# Altium PCB Mirny_AFE_Template.PcbDoc
Units mm, origin at the board's own origin, x right, y up, seen from the top; angles counter-clockwise.
Board outline 111.11 x 100 mm, 6 copper layers (L1, P2, L3, L4, P5, L6), stack 1.648 mm thick; 13 components, 19 nets, 50 pads, 20 vias.
Unrouted connection lines stored in the file: 1.
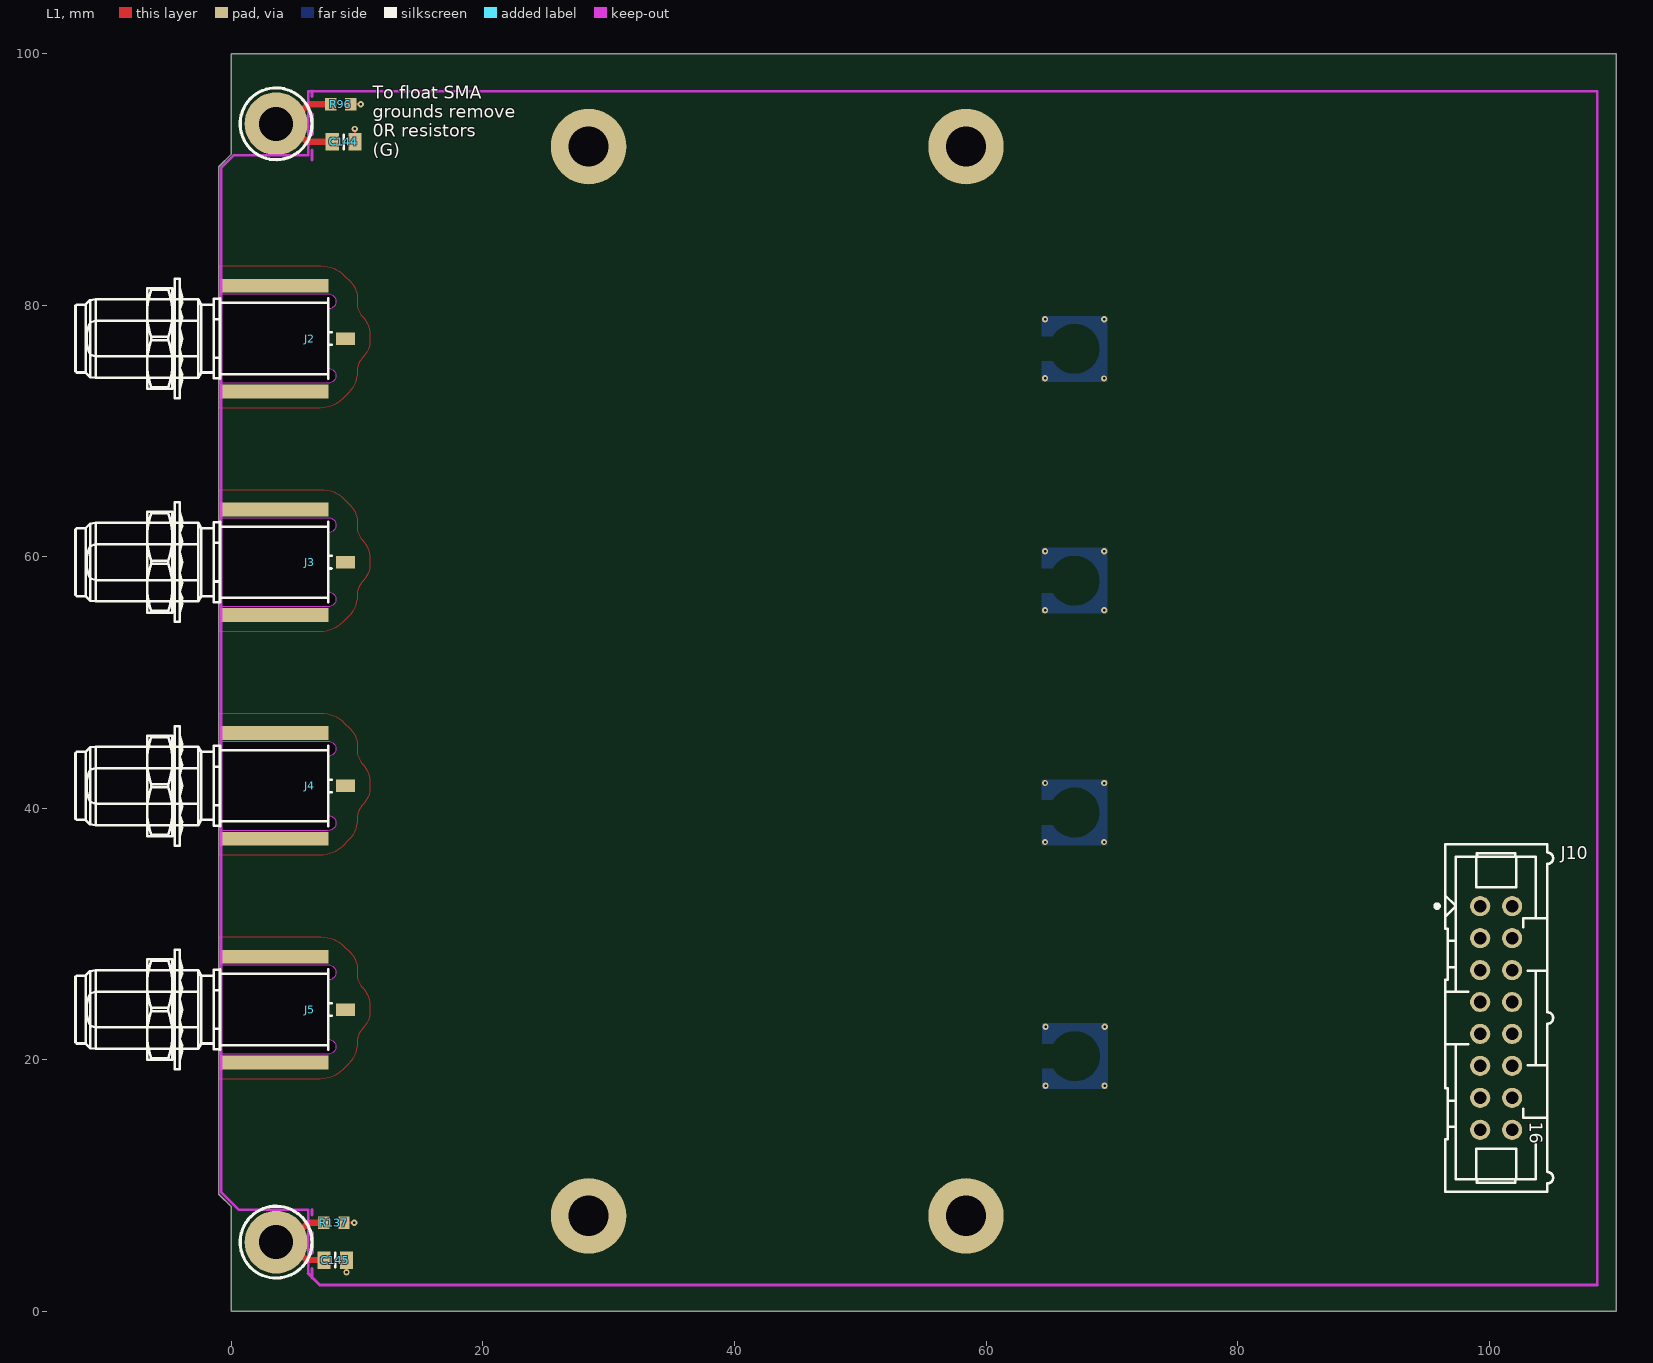
[diagram p0: L1 view]
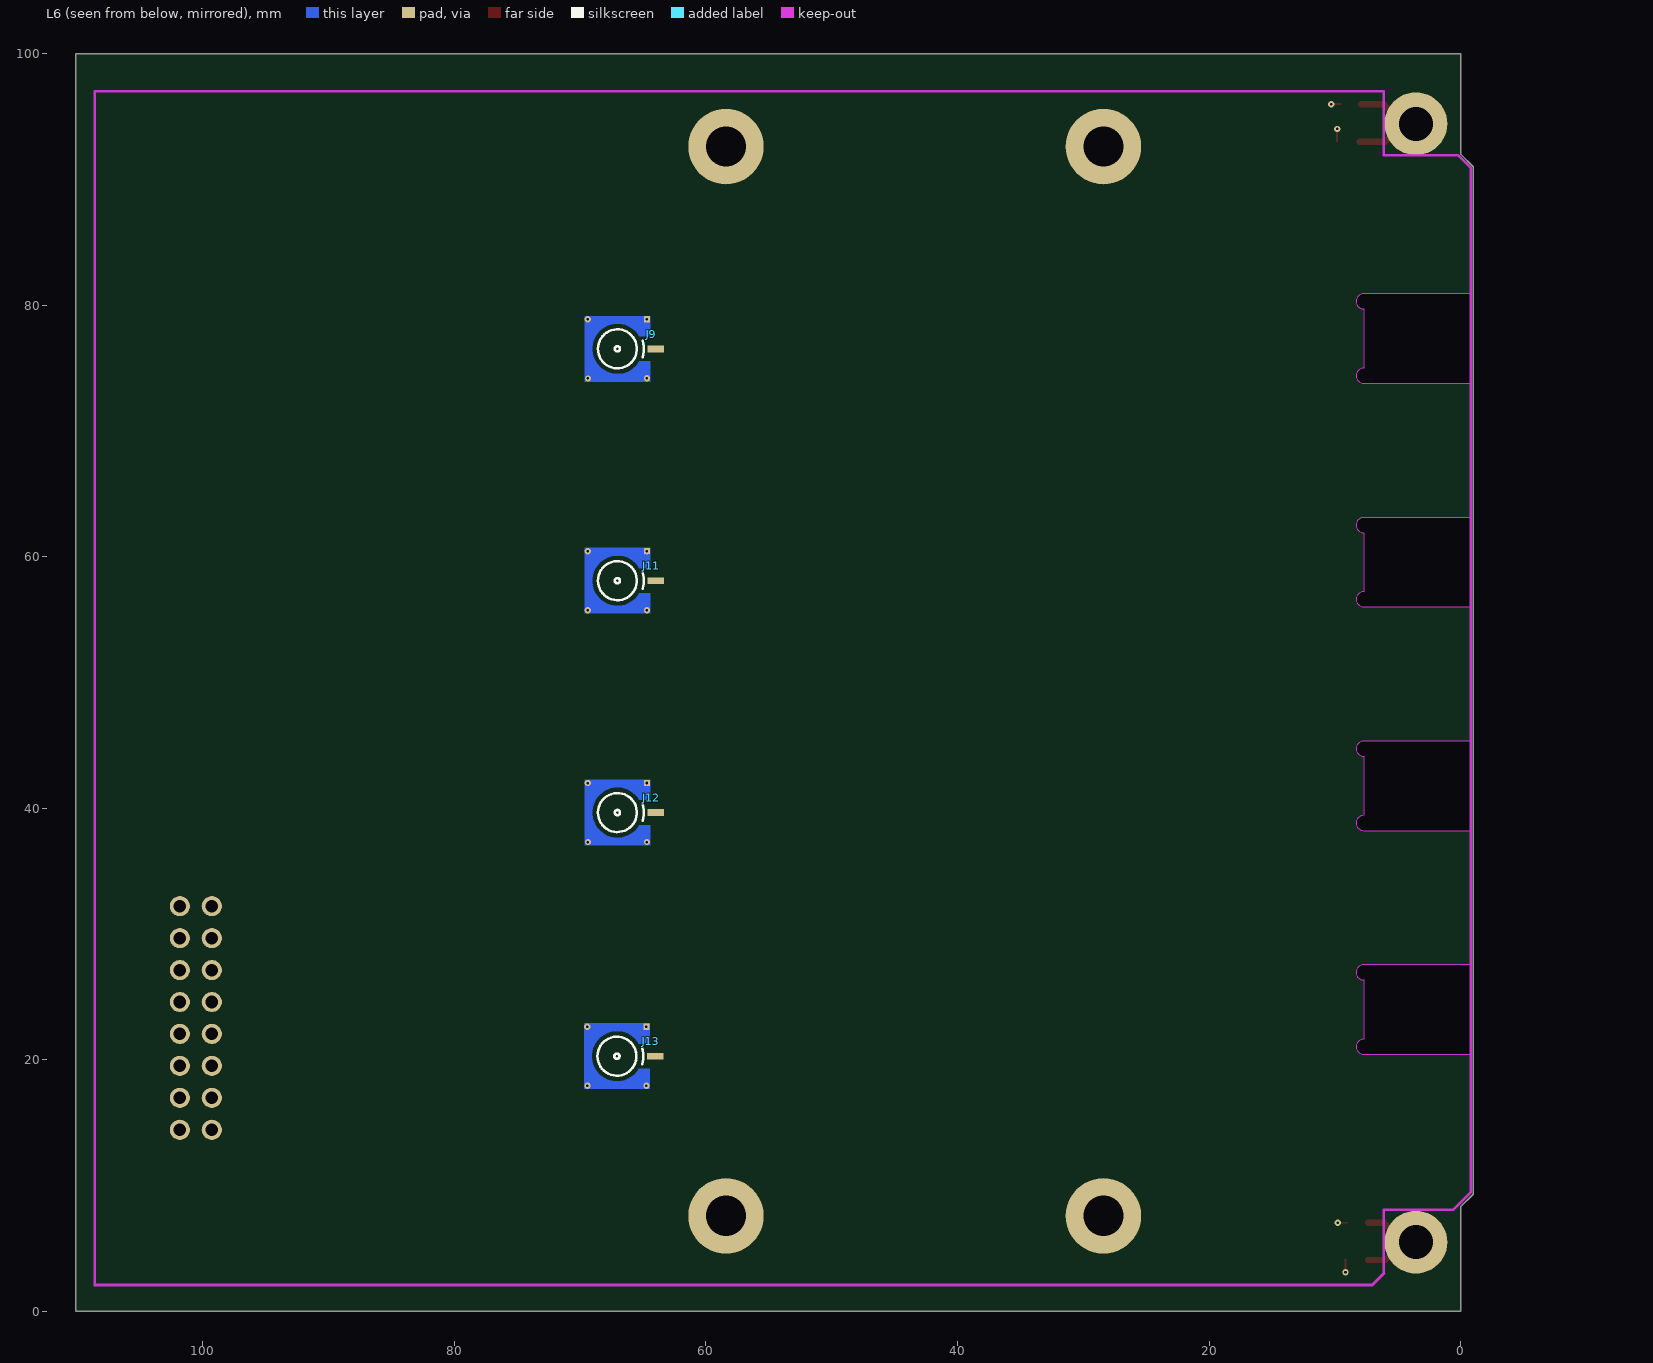
[diagram p1: L6 view, seen from below]
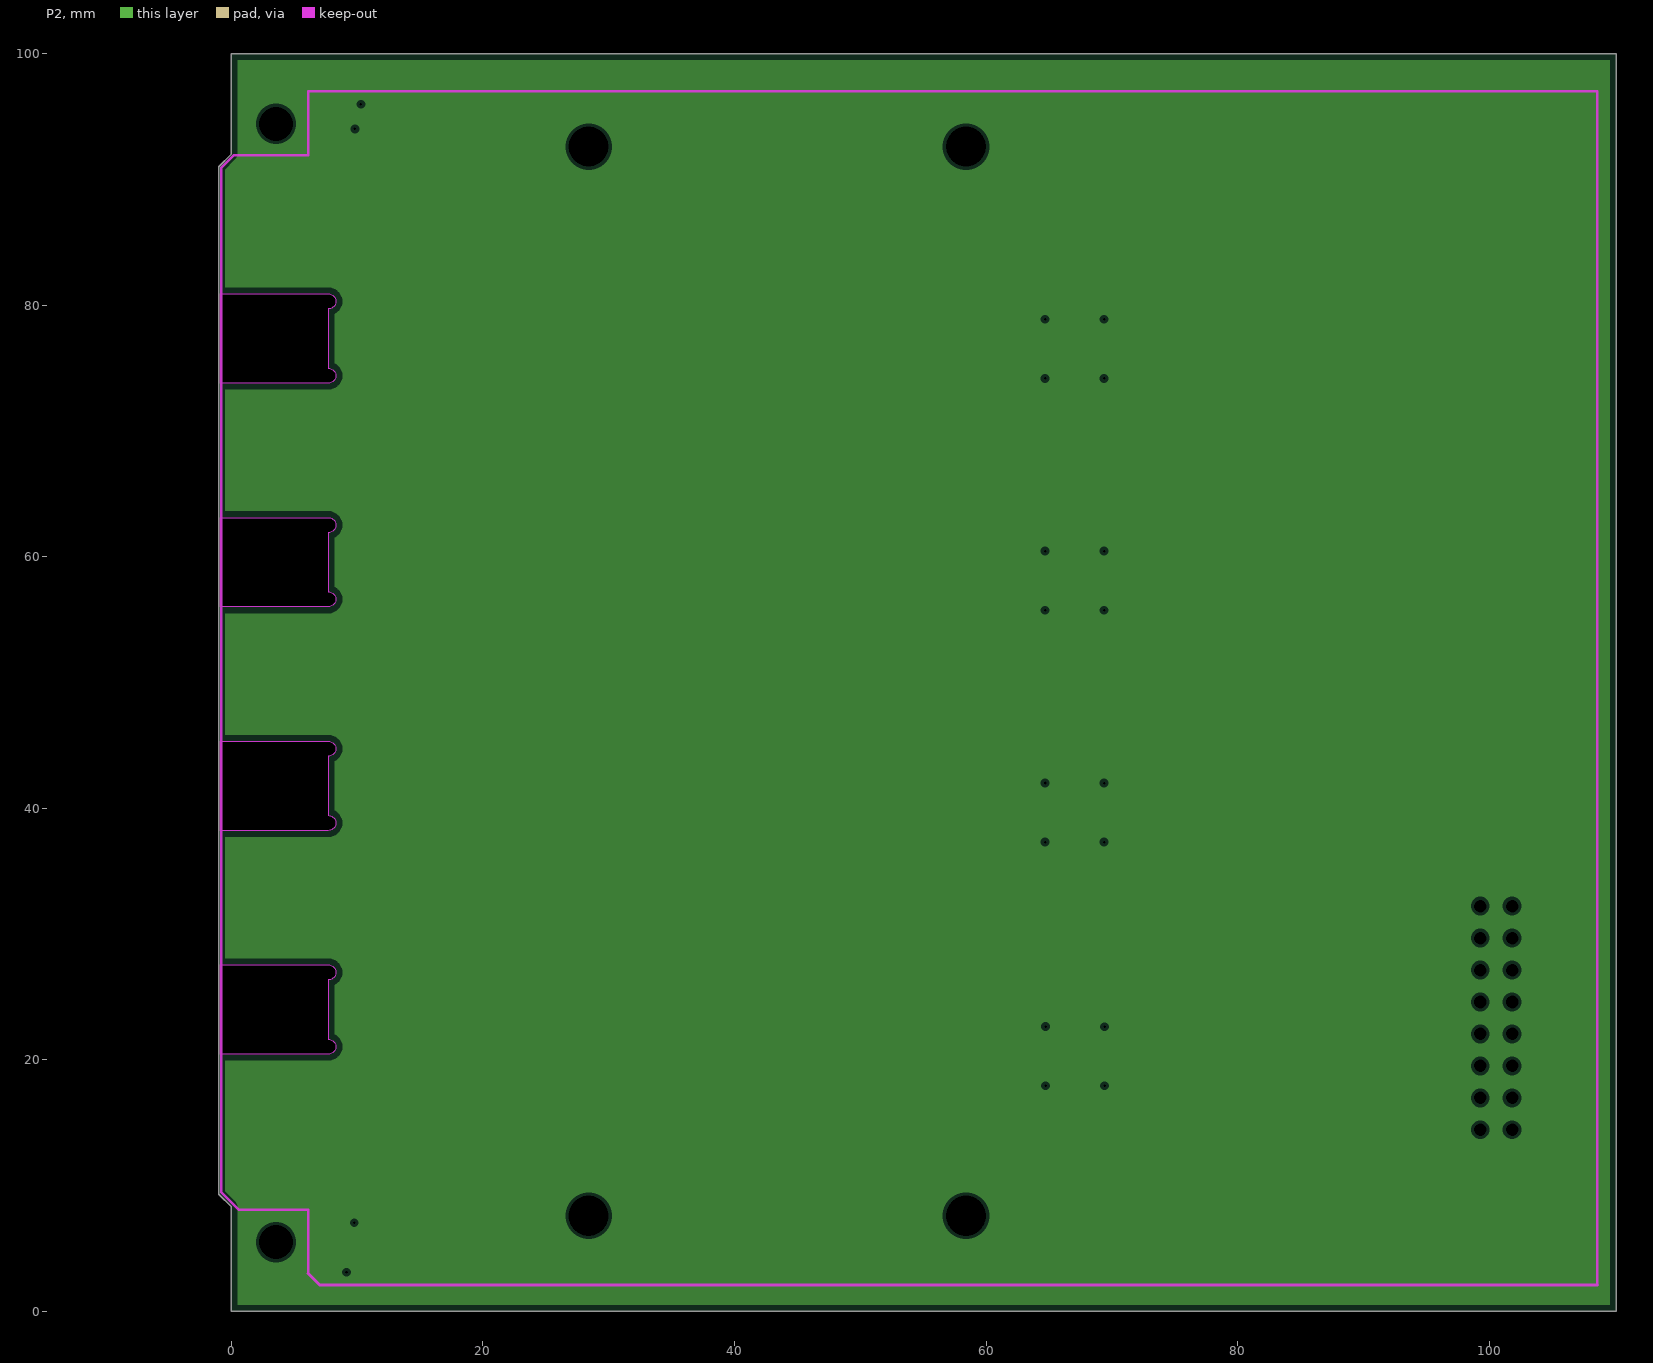
[diagram p2: P2, clearances drawn from the general rule]
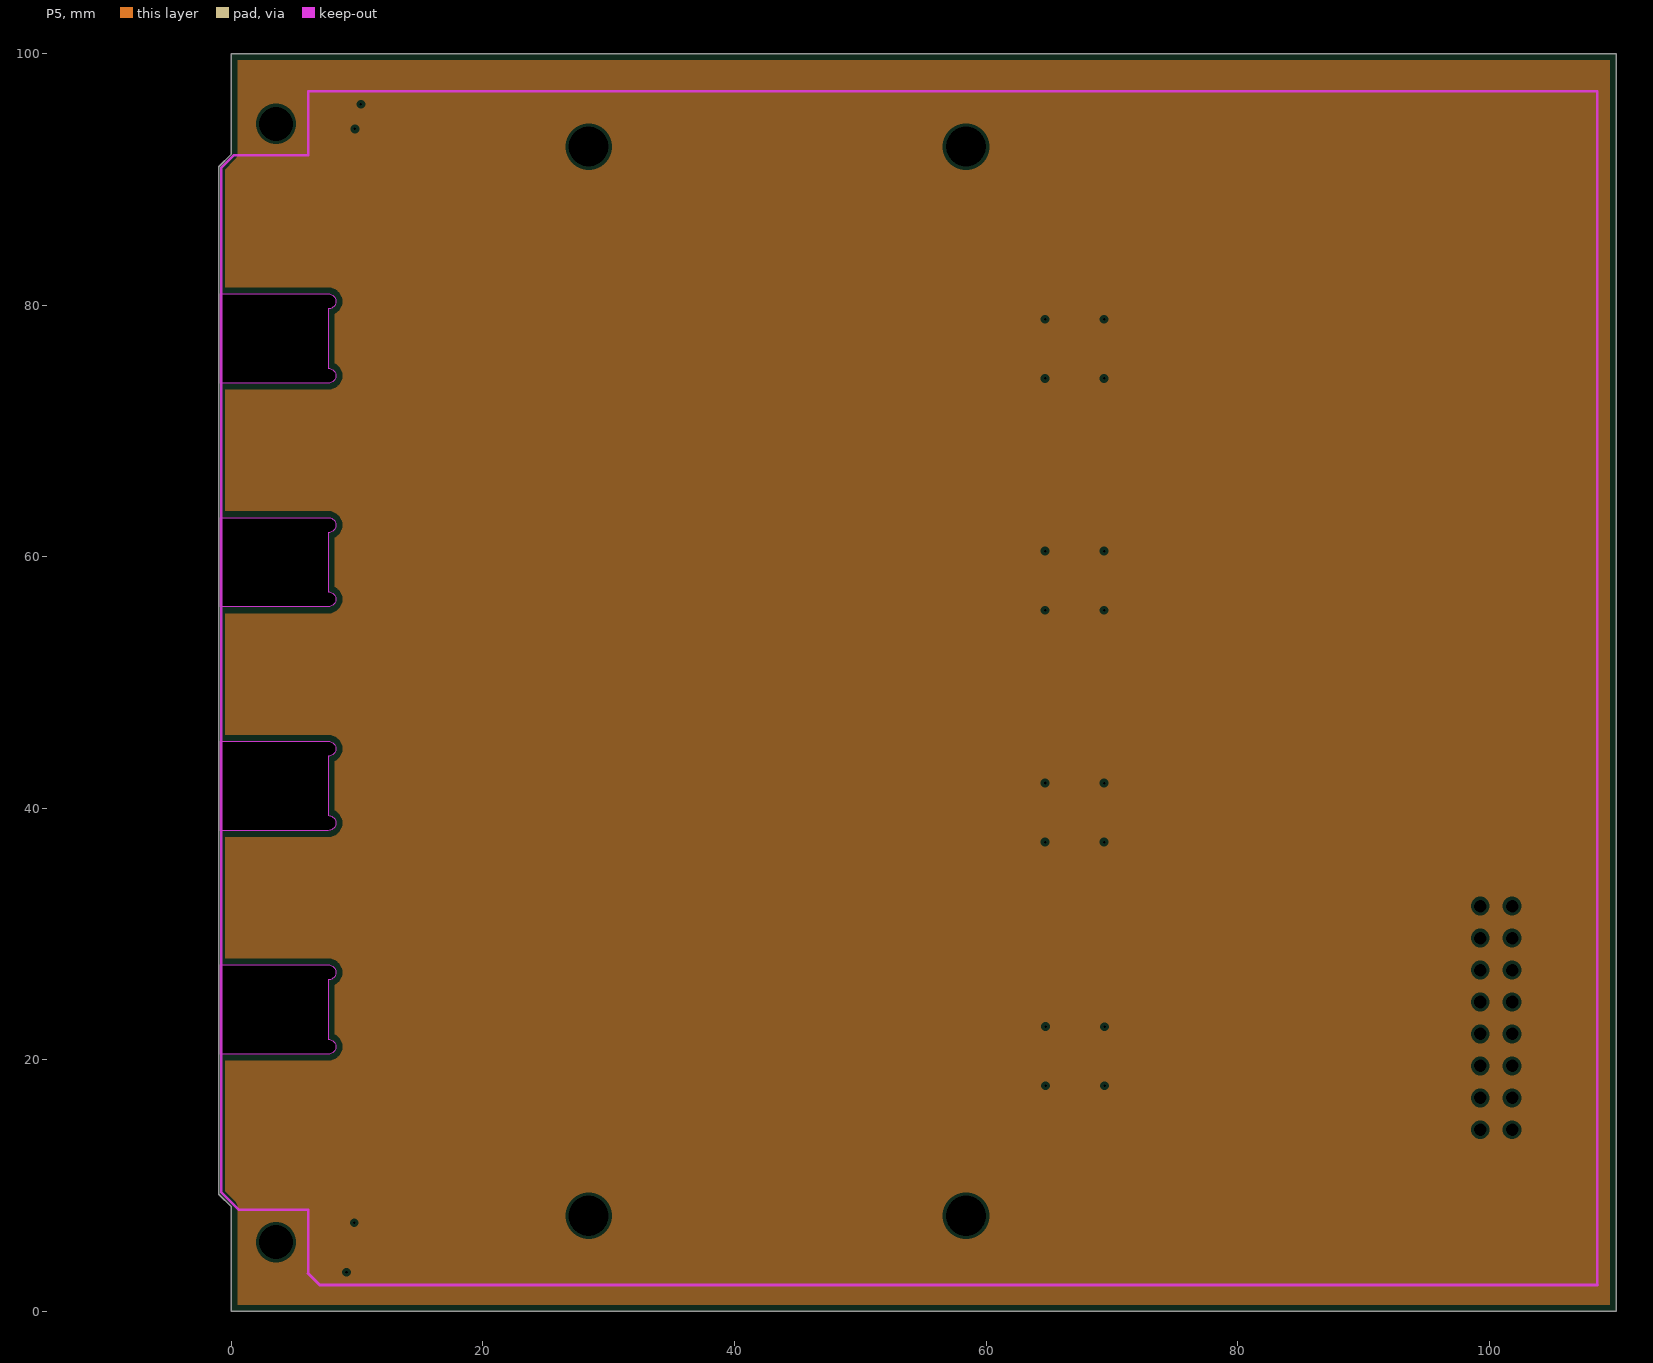
[diagram p3: P5, clearances drawn from the general rule]
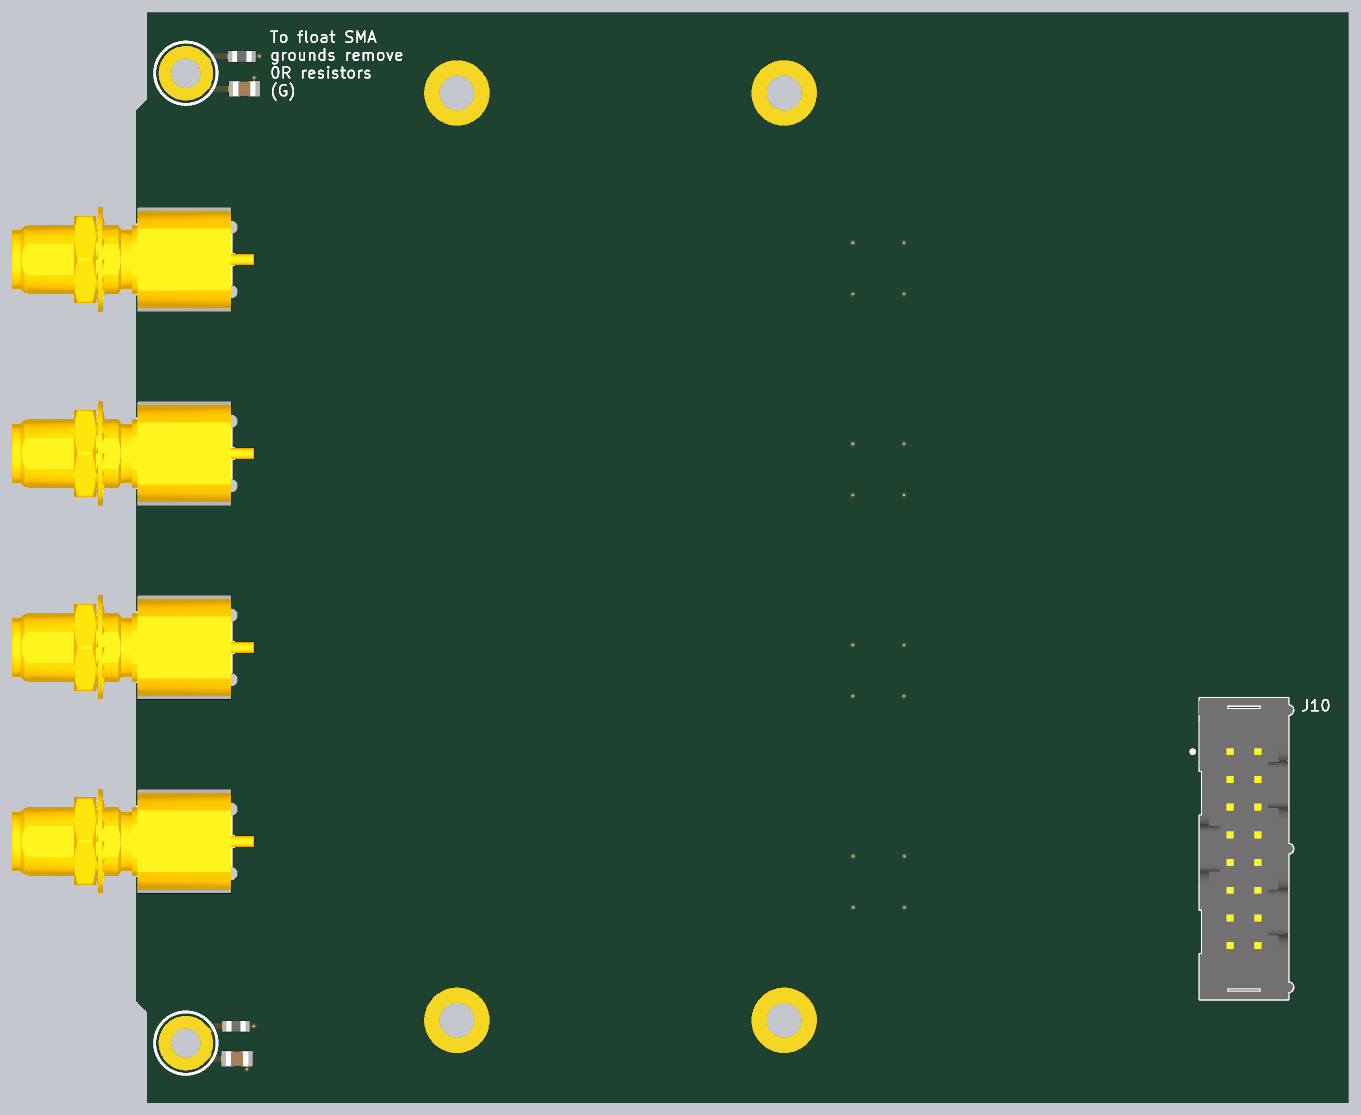
[diagram p4: 3D render of the assembled board from above, using the file's embedded part models]
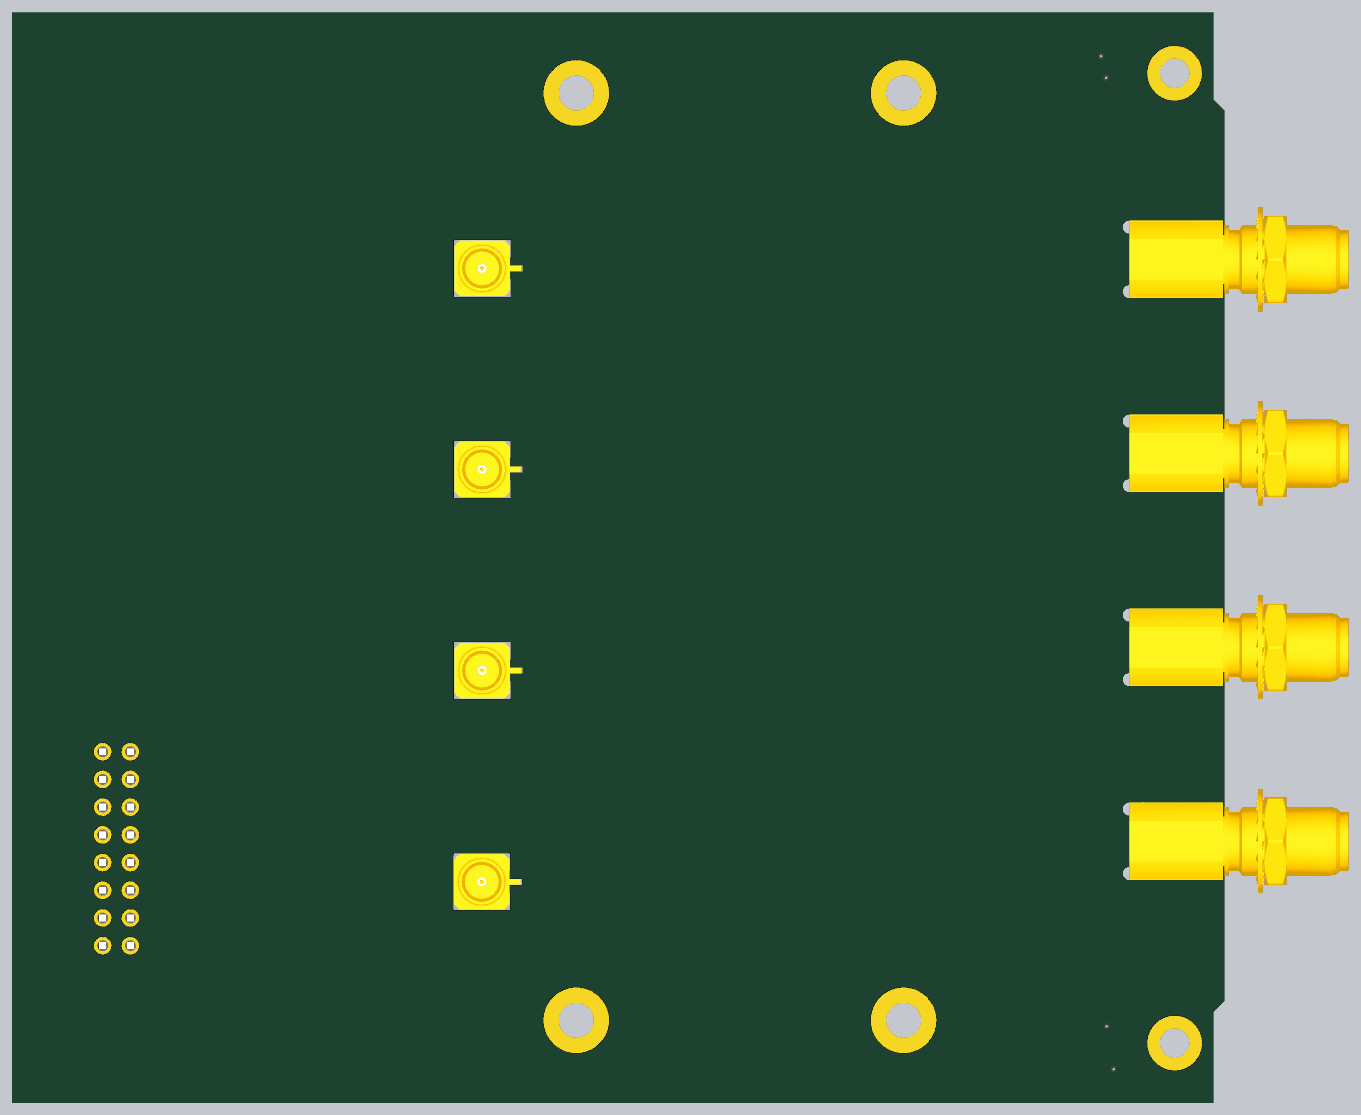
[diagram p5: 3D render of the assembled board from below, using the file's embedded part models]

## Layer stack, top to bottom
Top Solder: solder mask 0.034, Solder Resist, Dk 3.5
L1: signal copper 0.058
Dielectric1: core 0.18, FR4, Dk 3.66
P2: plane copper 0.018
Dielectric 9: prepreg 0.46, FR4, Dk 4.2
L3: signal copper 0.018
Dielectric 8: prepreg 0.18, Dk 4.2
L4: signal copper 0.018
Dielectric4: core 0.46, FR4, Dk 4.2
P5: plane copper 0.018
Dielectric3: core 0.18, FR4, Dk 4.2
L6: signal copper 0.058
Bottom Solder: solder mask 0.034, Solder Resist, Dk 3.5

## Board outline
-1,9.32 -1,91 0,92 0,100 110.109,100 110.109,0 0,0 0,8.32

## Design rules (kind name [scope] priority, off if disabled: settings)
AcuteAngle AcuteAngle_GND [InNet('GND')] p1: minimum=5.00000000000000E+0001 checktracksonly=FALSE
AcuteAngle [All] p2: minimum=5.00000000000000E+0001 checktracksonly=FALSE
Clearance Clearance_1 [InPolygon vs (InDifferentialPairClass('All Differential Pairs'))] p1: gap=0.254 ignorepadtopadclearanceinfootprint=FALSE except(0: Arc-Hole Track-Hole SMDPad-Hole THPad-Hole Via-Hole Fill-Hole Poly-Hole Region-Hole Text-Hole; 0.508: Track-Poly)
Clearance Clearance_KeepOut [OnLayer('Keep-Out Layer') vs NOT (InComponent('J8') OR InComponent('J11'))] p2: gap=0.1 ignorepadtopadclearanceinfootprint=FALSE except(0: Arc-Hole Track-Hole SMDPad-Hole THPad-Hole Via-Hole Fill-Hole Poly-Hole Region-Hole Text-Hole)
Clearance Clearance_50_Ohms_GND_VIA [InNetClass('50_Ohms') vs (IsVia AND InNet('GND')) and not(IsPad)] p3: gap=0.2 ignorepadtopadclearanceinfootprint=FALSE except(0: Arc-Hole Track-Hole SMDPad-Hole THPad-Hole Via-Hole Fill-Hole Poly-Hole Region-Hole Text-Hole)
Clearance Clearance_50_Ohms_GND_Plane [InNetClass('50_Ohms') vs InPolygon] p4: gap=0.5 ignorepadtopadclearanceinfootprint=FALSE except(0: Arc-Hole Track-Hole SMDPad-Hole THPad-Hole Via-Hole Fill-Hole Poly-Hole Region-Hole Text-Hole)
Clearance Clearance_50_Ohms_GND_PADS [InNetClass('50_Ohms') vs InNet('GND')] p5: gap=0.2 ignorepadtopadclearanceinfootprint=FALSE except(0: Arc-Hole Track-Hole SMDPad-Hole THPad-Hole Via-Hole Fill-Hole Poly-Hole Region-Hole Text-Hole)
Clearance Clearance_50_Ohms [InNetClass('50_Ohms')] p6: gap=0.2 ignorepadtopadclearanceinfootprint=FALSE except(0: Arc-Hole Track-Hole SMDPad-Hole THPad-Hole Via-Hole Fill-Hole Poly-Hole Region-Hole Text-Hole)
Clearance Clearance_DiffPair_1 [(InDifferentialPairClass('All Differential Pairs')) vs (InDifferentialPairClass('All Differential Pairs'))] p7 off: gap=0.3 ignorepadtopadclearanceinfootprint=FALSE except(0: Arc-Hole Track-Hole SMDPad-Hole THPad-Hole Via-Hole Fill-Hole Poly-Hole Region-Hole Text-Hole)
Clearance Clearance_Fiducials [InComponentClass('Fiducials')] p8: gap=0 ignorepadtopadclearanceinfootprint=TRUE
Clearance [Not (OnLayer('Keep-Out Layer'))] p9: gap=0.127 ignorepadtopadclearanceinfootprint=FALSE except(0: Arc-Hole Track-Hole SMDPad-Hole THPad-Hole Via-Hole Fill-Hole Poly-Hole Region-Hole Text-Hole; 0.203: Arc-Poly Track-Poly SMDPad-Poly THPad-Poly Via-Poly Fill-Poly Poly-Poly)
Clearance Clearance_abs [All] p10: gap=0.1 ignorepadtopadclearanceinfootprint=FALSE except(0: Arc-Hole Track-Hole SMDPad-Hole THPad-Hole Via-Hole Fill-Hole Poly-Hole Region-Hole Text-Hole)
ComponentClearance Clearance_TestPoint [(HasFootprint('TPS127'))] p1: gap=0 collisioncheckmode=3 verticalgap=0 showdistances=FALSE
ComponentClearance Clearance_FrontPanel [InComponentClass('Front Panel')] p2: gap=0 collisioncheckmode=3 verticalgap=0 showdistances=FALSE
ComponentClearance Clearance_ERNI [(HasFootprint('ERMET ZD 3-10 CONNECTOR')) vs (HasFootprint('ERMET ZD 3-10 CONNECTOR'))] p3: gap=0 collisioncheckmode=3 verticalgap=0.254 showdistances=FALSE
ComponentClearance Clearance_Radiall_Placement [HasFootprint('Coaxipack2') vs HasFootprint('Coaxipack2')] p4: gap=0 collisioncheckmode=3 verticalgap=0.254 showdistances=FALSE
ComponentClearance [All] p5: gap=0.254 collisioncheckmode=3 verticalgap=0.254 showdistances=FALSE
DiffPairsRouting CLK_DiffPairsRouting [(InDifferentialPairClass('All Differential Pairs'))] p1: maxlimit=0.178 minlimit=0.127 mostfreqgap=0.152 toplayer_minwidth=0.152 toplayer_maxwidth=0.152 toplayer_prefwidth=0.152 midlayer2_maxgap=0.152 midlayer2_prefgap=0.127 midlayer2_minwidth=0.178 midlayer2_maxwidth=0.178 midlayer2_prefwidth=0.178 midlayer3_maxgap=0.152 midlayer3_prefgap=0.127 midlayer3_minwidth=0.178 midlayer3_maxwidth=0.178 midlayer3_prefwidth=0.178 bottomlayer_minwidth=0.152 bottomlayer_maxwidth=0.152 bottomlayer_prefwidth=0.152 maxuncoupledlength=10
FabricationTestPointUsage TestPointUsage [All] p1: valid=0 allowmultiple=FALSE
FabricationTestpoint Testpoint [(IsPad And (OnTopLayer Or OnBottomLayer))] p1: side=3 testpointundercomponent=TRUE minsize=1.016 maxsize=2.54 preferedsize=1.524 minholesize=0 maxholesize=1.016 preferedholesize=0.813 testpointgrid=0.025 allowsidetop=TRUE allowsidebottom=TRUE usegrid=TRUE gridtolerance=0
Height BottomHeight [All] p1: minheight=0 maxheight=20 prefheight=10
Height TopHeight [OnLayer('Top Layer (LO)')] p2: minheight=0 maxheight=2.5 prefheight=1
HoleSize [All] p1: absolutevalues=TRUE maxlimit=5 minlimit=0.2 maxpercent=80.000 minpercent=20.000
HoleToHoleClearance [All] p1: gap=0.2 allowstackedmicrovias=TRUE
Length [All] p1: maxlimit=2540 minlimit=0
MatchedLengths [InDifferentialPairClass('All Differential Pairs')] p1: tolerance=25.4 checknetsindiffpair=TRUE checkdiffpairvsdiffpair=FALSE checkxsignals=FALSE checkothers=FALSE
MatchedLengths RFSW [InxSignalClass('RFSW')] p2: tolerance=2.54 checknetsindiffpair=FALSE checkdiffpairvsdiffpair=TRUE checkxsignals=TRUE checkothers=TRUE
MatchedLengths "CLK IC13" [InxSignalClass('CLK IC13')] p3: tolerance=1.27 checknetsindiffpair=FALSE checkdiffpairvsdiffpair=TRUE checkxsignals=TRUE checkothers=TRUE
MinimumAnnularRing MinimumAnnularRing_Blind [(InNetClass('50_Ohms') OR InDifferentialPairClass('All Differential Pairs'))] p1: minimumring=0.1
MinimumAnnularRing [All] p2: minimumring=0.15
MinimumSolderMaskSliver [All] p1: minsoldermaskwidth=0.2
PlaneClearance [All] p1: clearance=0.25
PlaneConnect PlaneConnect_pad [InPadClass('All Pads')] p1: planeconnectstyle=Relief reliefexpansion=0.508 reliefentries=4 reliefconductorwidth=0.254 reliefairgap=0.254
PlaneConnect [All] p2: planeconnectstyle=Direct reliefexpansion=0.508 reliefentries=4 reliefconductorwidth=0.254 reliefairgap=0.254
PolygonConnect PolygonConnect_pad [IsPad] p1: connectstyle=Relief reliefconductorwidth=0.15 reliefentries=4 polygonreliefangle="90 Angle" airgapwidth=0.152
PolygonConnect [All] p2: connectstyle=Direct reliefconductorwidth=0.254 reliefentries=4 polygonreliefangle="90 Angle" airgapwidth=0.254
RoutingVias [All] p1: holewidth=0.2 width=0.5 viastyle="Through Hole" minholewidth=0.2 minwidth=0.5 maxholewidth=0.5 maxwidth=1
SMDNeckDown [All] p1: percent=100.000
SMDToCorner [All] p1: distance=78740
SMDToPlane [All] p1: distance=0
SilkToSilkClearance [All] p1: silktosilkclearance=0
SilkToSolderMaskClearance SilkscreenOverComponentPads [IsPad] p1: minsilkscreentomaskgap=0.05 clearancetoexposedcopper=TRUE
SolderMaskExpansion SolderMaskExpansion_GND_VIA [IsVia AND InNet('GND')] p1: expansion=-0.1
SolderMaskExpansion [All] p2: expansion=0.05
Width 50_Ohm_Lines [InNetClass('50_Ohms')] p1: maxlimit=0.529 minlimit=0.181 preferedwidth=0.449 toplayer_minwidth=0.211 toplayer_maxwidth=0.304 toplayer_prefwidth=0.254 midlayer2_minwidth=0.381 midlayer3_minwidth=0.381 bottomlayer_maxwidth=0.271 bottomlayer_prefwidth=0.223 impedancedriven=TRUE minimp=45.000000 maximp=55.000000 favimp=50.000000
Width CLK_DiffPairs_Width [(InDifferentialPairClass('All Differential Pairs'))] p2: maxlimit=0.17 minlimit=0.152 preferedwidth=0.17 toplayer_maxwidth=0.152 toplayer_prefwidth=0.152 midlayer2_minwidth=0.17 midlayer3_minwidth=0.17 bottomlayer_maxwidth=0.152 bottomlayer_prefwidth=0.152 minimp=50.000000 maximp=50.000000 favimp=50.000000 checkconnectedcopper=TRUE
Width Width-SE [All] p3: maxlimit=0.5 minlimit=0.127 preferedwidth=0.152 minimp=49.000000 maximp=51.000000 favimp=50.000000
18 further rules are at their usual default settings.

## Classes and differential pairs
net class MEZZ_COMM_IO[1..0]: MEZZ_COMM_IO0 MEZZ_COMM_IO1
net class MEZZ_IO[7..0]: MEZZ_COMM_IO0 MEZZ_COMM_IO1 MEZZ_IO0 MEZZ_IO1 MEZZ_IO2 MEZZ_IO3
net class 50_Ohms: NetJ1_1 NetJ2_1
component class B2B_connectors: J2

## Components (designator, comment, footprint, x,y, rotation, side; value= is the part's Value field where it differs from the comment)
C144 "Undefined" CAPC2012X135N 8.919,92.984 r0 top
C145 "Undefined" CAPC2012X135N 8.254,4.084 r0 top
J2 "SMA" TELEGARTNER_J01151A0451 9.061,77.341 r180 top locked
J3 "SMA" TELEGARTNER_J01151A0451 9.061,59.561 r180 top locked (schematic designator J2)
J4 "SMA" TELEGARTNER_J01151A0451 9.061,41.781 r180 top locked (schematic designator J2)
J5 "SMA" TELEGARTNER_J01151A0451 9.061,24.001 r180 top locked (schematic designator J2)
J9 "SMP" MOLEX_85305-0232 67.031,76.522 r270 bottom
J10 "Header 16" 3M_N2516-6002RB 100.545,23.331 r270 top locked
J11 "SMP" MOLEX_85305-0232 67.032,58.095 r270 bottom
J12 "SMP" MOLEX_85305-0232 67.031,39.661 r270 bottom
J13 "SMP" MOLEX_85305-0232 67.07,20.295 r270 bottom
R96 "0" RESC1608X55N 8.69,95.956 r0 top
R137 "0" RESC1608X55N 8.154,7.056 r0 top

## Footprints (in the part's own frame and the unit in brackets; to place one, negate y for a bottom-side part, rotate by r counter-clockwise, add the part's x,y. Pads: shape width x height; smd on the part's side, far side on the other; paste and mask are expansions set on the pad)
3M_N2516-6002RB [mm] "16 Contacts - Straight .100\" x .100\" Low Profile Four-Wall Header"
  round 1.6 hole 1: 1(-8.89,-1.27) 2(-8.89,1.27) 3(-6.35,-1.27) 4(-6.35,1.27) 5(-3.81,-1.27) 6(-3.81,1.27) 7(-1.27,-1.27) 8(-1.27,1.27) 9(1.27,-1.27) 10(1.27,1.27) 11(3.81,-1.27) 12(3.81,1.27) 13(6.35,-1.27) 14(6.35,1.27) 15(8.89,-1.27) 16(8.89,1.27)
  silkscreen extent -13.82,-4.85 13.82,4.52, body extent -13.82,-4.17 13.82,4.52, height 9.65
CAPC2012X135N [mm] "Chip Capacitor, Body 2.0x1.25mm, IPC Medium Density"
  rect 1.05x1.4 smd: 1(-0.9,0) 2(0.9,0)
  silkscreen extent 0,-0.58 0,0.58, body extent -1.05,-0.67 1.05,0.68, height 1.25
MOLEX_85305-0232 [mm] "50 Ohms, SMP Surface Mount Plug, Limited Detent"
  rect 0.54x1.3 smd: 1(0,3.05)
  rect 0.5x0.5 smd paste-0.25 mask-0.25: 2(-2.35,2.35)
  L1 region: -2.6,-2.6 -2.6,2.6 -1,2.6 -1,1.732 -1.732,1 -2,0 -1.732,-1 -1,-1.732 0,-2 1,-1.732 1.732,-1 2,0 1.732,1 1,1.732 1,1.732 1,2.6 2.6,2.6 2.6,-2.6
  silkscreen extent -1.55,-1.55 1.55,2.1, body extent -2.54,-2.54 2.54,3.54, height 4.1
RESC1608X55N [mm] "Chip Resistor, EIA 0603, Metric 1608, Body 1.6x0.8mm, IPC Medium Density"
  rect 0.9x1 smd: 1(-0.8,0) 2(0.8,0)
  body extent -0.87,-0.47 0.88,0.48, height 0.55
TELEGARTNER_J01151A0451 [mm] "SMA 50 ohm Edge Mount Bulkhead Jack Receptacle"
  rect 1.5x1 smd: 1(0,0)
  rect 8.6x1.1 smd: 2(5.65,4.2) 2(5.65,-4.2)
  Keep-Out Layer board cut-out: 1.35,-3.55 1.09,-3.491 0.881,-3.324 0.765,-3.084 0.765,-2.816 0.881,-2.576 1.09,-2.409 1.35,-2.35 1.35,-2.35 1.35,2.35 1.09,2.409 0.881,2.576 0.765,2.816 0.765,3.084 0.881,3.324 1.09,3.491 1.35,3.55 1.35,3.55 9.95,3.55 9.95,-3.55
  silkscreen extent 1.1,-4.75 21.45,4.75, body extent -0.65,-4.75 21.45,4.75, height 5.25

## Part data
C144 C145: library part CC0805_NO-VALUE, "Non-polarised capacitor", Case=0805, Manufacturer1 ComponentHeight=1.35mm, Author="CERN DEM JLC", Component Type=Standard, CreateDate=10.12.2008, HelpURL=Undefined, LatestRevisionDate=11.09.2013, Manufacturer=Undefined, Manufacturer Part Number=CC0805_NO-VALUE, Mounted=No, Part Description="Reserved Footprint For 0805(2012) Chip Ceramic Capacitor", Part Number=CC0805_NO-VALUE, Pin Count=2, Sense=No, SMD=Yes, Socket=No, Status=None
J2 J3 J4 J5: library part TELEGARTNER_J01151A0451, Manufacturer=TELEGARTNER, Manufacturer Part Number=J01151A0451, Author="CERN DEM JLC", ComponentHeight=7mm, Component Type=Standard, CreateDate=27.10.2016, Family=SMA, HelpURL=\\cern.ch\dfs\Applications\Altium\Datasheets\TELEGARTNER_J01151A0451.pdf, LatestRevisionDate=27.10.2016, Mounted=Yes, Part Description="SMA 50 ohms Edge Mount Bulkhead Jack Receptacle", Part Number=TELEGARTNER_J01151A0451, Pin Count=2, PressFit=No, Sense=No, SMD=No, Socket=No, Status=None
J9 J11 J12 J13: library part MOLEX_85305-0232, Manufacturer=MOLEX, Manufacturer Part Number=85305-0232, Author="CERN DEM JMW", ComponentHeight=4.1mm, Component Type=Standard, CreateDate=09.08.2016, Family=SMP, HelpURL=\\cern.ch\dfs\Applications\Altium\Datasheets\MOLEX_85305-0232.pdf, LatestRevisionDate=09.08.2016, Mounted=Yes, Part Description="50 Ohms, SMP Surface Mount Plug, Limited Detent", Part Number=MOLEX_85305-0232, Pin Count=2, PressFit=No, Sense=No, SMD=Yes, Socket=No, Status=None
J10: library part 3M_N2516-6002RB, "Connector 16 Male", Manufacturer=3M, Manufacturer Part Number=N2516-6002RB, Author="CERN DEM JLC", ComponentHeight=10.03mm, Component Type=Standard, CreateDate=11.02.2009, Family="Header 16", HelpURL=\\cern.ch\dfs\Applications\Altium\Datasheets\3M_N2516-6002RB.pdf, LatestRevisionDate=11.08.2009, Mounted=Yes, Part Description="16 Contacts - Straight .100'' x .100'' Low Profile Four-Wall Header, 2500 Series", Part Number=3M_N2516-6002RB, Pin Count=16, PressFit=No, Sense=No, SMD=No, Socket=No, Status=None
R96 R137: library part R0603_0R_JUMPER, "Resistor", Case=0603, Manufacturer=GENERIC, Manufacturer1 ComponentHeight=0.55mm, Manufacturer1 Example="NIC COMPONENT", Manufacturer1 Part Number=NRC06Z0, Author="CERN DEM JLC", Component Type=Standard, CreateDate=03.12.2007, HelpURL=\\cern.ch\dfs\Applications\Altium\Datasheets\R0603_NIC_NRC.pdf, LatestRevisionDate=13.03.2008, Manufacturer Part Number=R0603_0R_JUMPER, Mounted=Yes, Part Description="1A (0.05R Max DC Resistance) Zero Ohm Jumper", Part Number=R0603_0R_JUMPER, Pin Count=2, PressFit=No, Sense=No, SMD=Yes, Socket=No, Status=Preferred

## Free pads (board coordinates)
  round 6 hole 3.2: 0(58.4,7.6) 1(58.4,92.6) 2(28.4,92.6) 3(28.4,7.6)
  round 5 hole 2.7: 1(3.556,94.412) 2(3.556,5.512)

## Via types
v1: diameter 0.5, hole 0.2, L1 to L6, tented both sides, 20 vias

## Nets (pads, with @x,y where several pads share a name; then routed paths per layer and width w, separated by ;. In a path a pad name is that pad's centre, name@x,y a point inside that pad or via, vN(x,y) a via of type N, cw(c..) or ccw(c..) an arc to the next point about the centre after c; other vN are vias at no path point)
GND: J2.2
MEZZ_COMM_IO0: 
MEZZ_COMM_IO1: 
MEZZ_IO0: 
MEZZ_IO1: 
MEZZ_IO2: 
MEZZ_IO3: 
MEZZ_IO4: 
MEZZ_IO5: 
MEZZ_IO6: 
MEZZ_IO7: 
MEZZ_SCL: 
MEZZ_SDA: 
N5V5A: 
NetJ1_1: 
NetJ2_1: J2.1
P3V3: 
P5V5A: 
P7V5A: 
pads on no net: C144.1 C144.2 C145.1 C145.2 J3.1 J3.2 J4.1 J4.2 J5.1 J5.2 J9.1 J9.2 J10.1 J10.2 J10.3 J10.4 J10.5 J10.6 J10.7 J10.8 J10.9 J10.10 J10.11 J10.12 J10.13 J10.14 J10.15 J10.16 J11.1 J11.2 J12.1 J12.2 J13.1 J13.2 R96.1 R96.2 R137.1 R137.2
copper on no net: | length 20.2
  L1 w0.152: 8.985,7.056 v1(9.769,7.056) ; v1(9.154,3.119) 9.154,4.084 9.179,4.109 9.154,4.135 ; 9.513,95.974 v1(10.297,95.974) ; 9.819,92.984 9.844,93.009 9.819,93.035 v1(9.819,94)
  L1 w0.5: 3.556,5.512 4.555,5.512 6.099,7.056 7.354,7.056 ; 3.556,94.412 4.555,94.412 6.099,95.956 7.89,95.956 ; 4.954,5.512 4.954,5.127 5.998,4.084 7.354,4.084 ; 4.954,94.412 4.954,94.028 5.998,92.984 8.019,92.984
  other v1: 64.721,17.948 69.416,17.946 64.723,22.644 69.418,22.641 64.683,37.314 69.377,37.312 64.685,42.01 69.38,42.007 64.684,55.748 69.378,55.746 64.686,60.444 69.381,60.441 64.683,74.175 69.377,74.173 64.685,78.871 69.38,78.868

## Polygon pours and split planes (outlines as drawn)
no net on L4 "NONET_L04_P000" (solid, remove dead copper, pour order 0): -48.998,-107.731
no net on L1 "NETC51_2_L01_P075" (solid, remove dead copper, pour order 8): -0.976,29.777 7.153,29.777 cw(c7.153,27.237) 8.949,29.033 9.483,28.499 cw(c8.215,27.231) 10.008,27.231 10.008,26.742 ccw(c11.374,26.742) 10.408,25.777 cw(c8.96,24.328) 11.008,24.328 11.008,23.784 cw(c9.301,23.784) 10.508,22.577 ccw(c11.707,21.373) 10.008,21.377 cw(c7.594,21.377) 9.301,19.67 8.852,19.221 cw(c7.056,21.017) 7.056,18.477 -0.962,18.477
no net on L1 "NETC51_2_L01_P075" (solid, remove dead copper, pour order 6): -0.976,47.557 7.153,47.557 cw(c7.153,45.017) 8.949,46.813 9.483,46.279 cw(c8.215,45.011) 10.008,45.011 10.008,44.522 ccw(c11.374,44.522) 10.408,43.557 cw(c8.96,42.108) 11.008,42.108 11.008,41.564 cw(c9.301,41.564) 10.508,40.357 ccw(c11.707,39.153) 10.008,39.157 cw(c7.594,39.157) 9.301,37.45 8.852,37.001 cw(c7.056,38.797) 7.056,36.257 -0.962,36.257
no net on L1 "NETC51_2_L01_P075" (solid, remove dead copper, pour order 4): -0.976,65.337 7.153,65.337 cw(c7.153,62.797) 8.949,64.593 9.483,64.059 cw(c8.215,62.791) 10.008,62.791 10.008,62.302 ccw(c11.374,62.302) 10.408,61.337 cw(c8.96,59.888) 11.008,59.888 11.008,59.344 cw(c9.301,59.344) 10.508,58.137 ccw(c11.707,56.933) 10.008,56.937 cw(c7.594,56.937) 9.301,55.23 8.852,54.781 cw(c7.056,56.577) 7.056,54.037 -0.962,54.037
GND on L1 "NETC51_2_L01_P075" (solid, remove dead copper, pour order 2): -0.976,83.117 7.153,83.117 cw(c7.153,80.577) 8.949,82.373 9.483,81.839 cw(c8.215,80.571) 10.008,80.571 10.008,80.082 ccw(c11.374,80.082) 10.408,79.117 cw(c8.96,77.668) 11.008,77.668 11.008,77.124 cw(c9.301,77.124) 10.508,75.917 ccw(c11.707,74.713) 10.008,74.717 cw(c7.594,74.717) 9.301,73.01 8.852,72.561 cw(c7.056,74.357) 7.056,71.817 -0.962,71.817
no net on P2 (split plane): 373 vertices, not listed, extent -0.49,0.51 109.599,99.489
no net on P5 (split plane): 373 vertices, not listed, extent -0.49,0.51 109.599,99.489

## Keep-outs
L1:
  lines w0.254: 6.404,2.661 6.404,3.402 ; 6.404,7.691 6.404,8.102 ; 6.404,91.562 6.404,92.302 ; 6.404,96.591 6.404,97.003 ; 6.429,4.668 6.429,6.268 ; 6.429,93.568 6.429,95.168
Keep-Out Layer:
  lines w0.203: 6.096,3.023 6.096,8.103 0.584,8.103 -0.813,9.5 -0.813,90.9 0.21,91.923 6.096,91.923 6.096,97.003 108.585,97.003 108.585,2.103
  lines w0.254: 6.096,3.023 7.016,2.103 108.585,2.103

## Silkscreen, mask and mechanical layers (free items; w line width, h text height)
Top Overlay:
  circle w0.254: c3.556,94.412 r2.857
  circle w0.254: c3.556,5.512 r2.857
  text "To float SMA / grounds remove / 0R resistors / (G)" at 11.227,91.85 h1.02
Mechanical 1:
  lines w0.1: -1,9.32 0,8.32 0,0 110.109,0 110.109,100 0,100 0,92 -1,91 -1,84.025 -1,9.32
Mechanical 13:
  lines w0.152: -5.044,-14.238 -5.044,118.375 ; -2.544,-14.238 -2.544,118.375

## Text inside footprints (layer, text, board x,y; h text height)
J2: Drill Drawing "r0.6" at 6.525,75.109 h1 r180; Drill Drawing "8.6" at 4.299,78.95 h1 r180; Drill Drawing "7.1" at 1.172,77.585 h1 r270; Mechanical 8 "2.5mm" at 1.061,76.091 h1 r180; Mechanical 8 "3mm" at -3.989,76.066 h1 r180
J3: Drill Drawing "7.1" at 1.172,59.805 h1 r270; Drill Drawing "8.6" at 4.299,61.17 h1 r180; Drill Drawing "r0.6" at 6.525,57.329 h1 r180; Mechanical 8 "3mm" at -3.989,58.286 h1 r180; Mechanical 8 "2.5mm" at 1.061,58.311 h1 r180
J4: Drill Drawing "7.1" at 1.172,42.025 h1 r270; Drill Drawing "8.6" at 4.299,43.39 h1 r180; Drill Drawing "r0.6" at 6.525,39.549 h1 r180; Mechanical 8 "3mm" at -3.989,40.506 h1 r180; Mechanical 8 "2.5mm" at 1.061,40.531 h1 r180
J5: Drill Drawing "7.1" at 1.172,24.245 h1 r270; Drill Drawing "8.6" at 4.299,25.61 h1 r180; Drill Drawing "r0.6" at 6.525,21.769 h1 r180; Mechanical 8 "3mm" at -3.989,22.726 h1 r180; Mechanical 8 "2.5mm" at 1.061,22.751 h1 r180
J10: Top Overlay "16" at 103.212,15.076 h1.02 r270; Mechanical 14 "16" at 103.212,15.076 h1.02 r270